# EAGLE board 04B-345-A1-01 (EAGLE 9.6.2)
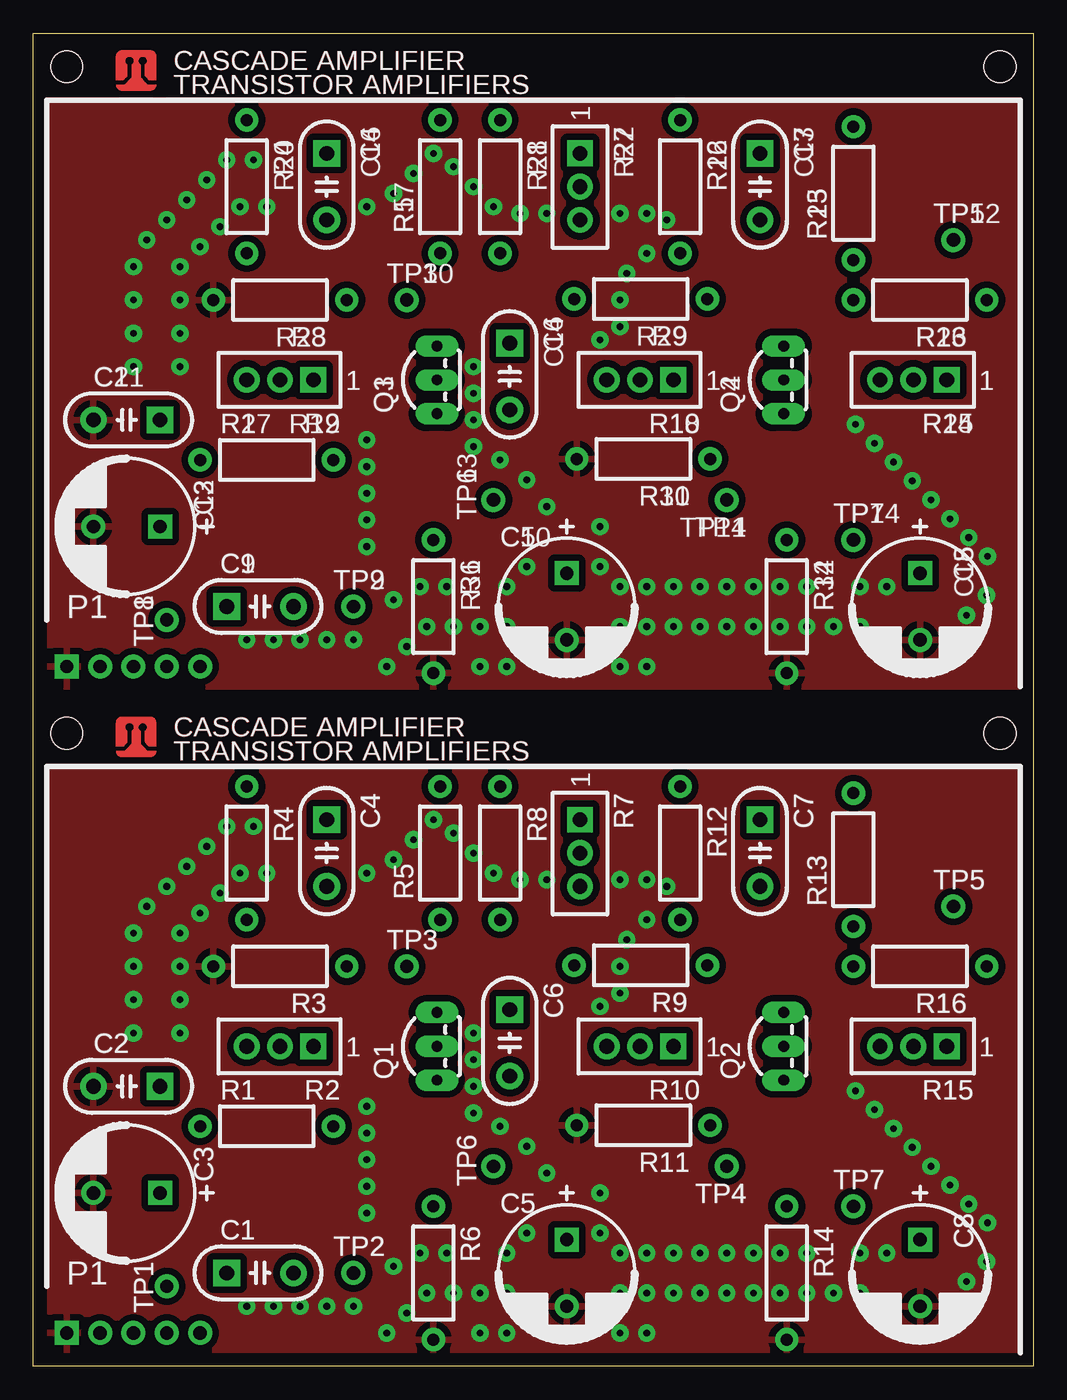
[diagram p0: board, top side]
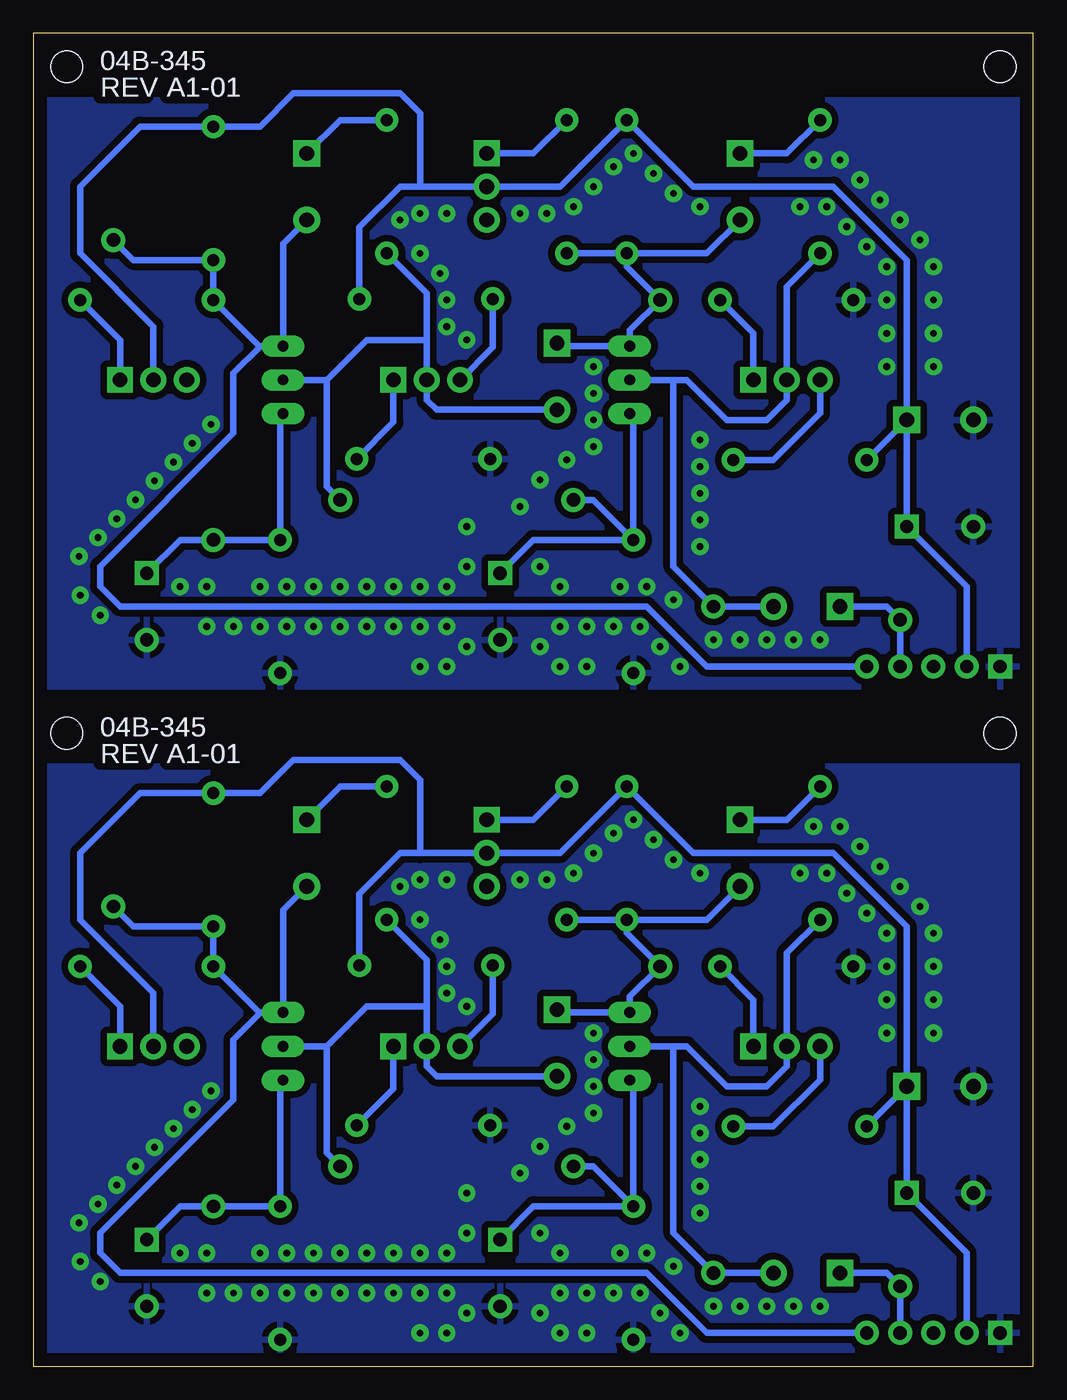
[diagram p1: board, bottom side, seen from below]

Size 75 x 100 mm. Coordinates in mm from the lower left corner, seen from the top.
Outline: 0,0 0,100 75,100 75,0 0,0
Copper layers (1*16): Top 0.035mm / dielectric 1.5mm / Bottom 0.035mm
Design rules "minipcb-THD": minimum track width 0.5mm, minimum drill 0.5mm, track to track 0.5mm, track to pad 0.5mm, pad to pad 0.5mm, via to via 0.5mm, smd to smd 0mil, copper to edge 1mm, drill to drill 1mm, minimum pad ring 0.4mm, minimum via ring 0.4mm, stop-mask expansion 0.1mm, vias tented up to drill 0.6mm, thermal gap 0.5mm

## Footprints (pad centres in the part's own frame; a part is rotated, then mirrored left to right if it is on the bottom)
C050-024X044 = drill 1.1 pad 2 square: 1 -2.5,0 | drill 1.1 pad 2: 2 2.5,0
C5MM = drill 1 square: + -2.5,0 | drill 1: - 2.5,0
PINS_1X5 = drill 1 square: 1 0,0 | drill 1: 2 2.5,0; 3 5,0; 4 7.5,0; 5 10,0
MINIPCB_0P_50X75 = hole 2.4: 72.5,47.5; 2.5,47.5
TO92-EBC-OVAL = drill 0.813 long: B 0,-1.27; C 2.54,-1.27; E -2.54,-1.27
0204/10 = drill 0.9 pad 1.75: 1 -5,0; 2 5,0
TRIM_0100 = drill 1.1 pad 1.93 square: 1 0,0 | drill 1.1 pad 1.93: 2 2.5,0; 3 5,0
PINS_1_TESTPOINT_KE5000_NOTEXT = drill 1: 1 0,0

## Placement (x,y rotation side)
C1  [C050-024X044]  17,7 0 top
C2  [C050-024X044]  7,21 180 top
C3  [C5MM]  7,13 180 top
C4  [C050-024X044]  22,38.5 270 top
C5  [C5MM]  40,7 270 top
C6  [C050-024X044]  35.73,24.26 270 top
C7  [C050-024X044]  54.5,38.5 270 top
C8  [C5MM]  66.5,7 270 top
C9  [C050-024X044]  17,57 0 top
C10  [C5MM]  40,57 270 top
C11  [C050-024X044]  7,71 180 top
C12  [C5MM]  7,63 180 top
C13  [C050-024X044]  54.5,88.5 270 top
C14  [C050-024X044]  35.73,74.26 270 top
C15  [C5MM]  66.5,57 270 top
C16  [C050-024X044]  22,88.5 270 top
P1  [PINS_1X5]  2.5,2.5 0 top
P2  [PINS_1X5]  2.5,52.5 0 top
PCB1  [MINIPCB_0P_50X75]  0,0 0 top
PCB2  [MINIPCB_0P_50X75]  0,50 0 top
Q1  [TO92-EBC-OVAL]  29,24 90 top
Q2  [TO92-EBC-OVAL]  55,24 90 top
Q3  [TO92-EBC-OVAL]  29,74 90 top
Q4  [TO92-EBC-OVAL]  55,74 90 top
R1  [0204/10]  17.5,18 0 top
R2  [TRIM_0100]  21,24 180 top
R3  [0204/10]  18.5,30 180 top
R4  [0204/10]  16,38.5 270 top
R5  [0204/10]  30.5,38.5 90 top
R6  [0204/10]  30,7 270 top
R7  [TRIM_0100]  41,41 270 top
R8  [0204/10]  35,38.5 270 top
R9  [0204/10]  45.55,30.07 180 top
R10  [TRIM_0100]  48,24 180 top
R11  [0204/10]  45.75,18.07 180 top
R12  [0204/10]  48.5,38.5 270 top
R13  [0204/10]  61.5,38 90 top
R14  [0204/10]  56.5,7 270 top
R15  [TRIM_0100]  68.5,24 180 top
R16  [0204/10]  66.5,30 180 top
R17  [0204/10]  30.5,88.5 90 top
R18  [TRIM_0100]  48,74 180 top
R19  [TRIM_0100]  21,74 180 top
R20  [0204/10]  16,88.5 270 top
R21  [0204/10]  35,88.5 270 top
R22  [TRIM_0100]  41,91 270 top
R23  [0204/10]  66.5,80 180 top
R24  [TRIM_0100]  68.5,74 180 top
R25  [0204/10]  61.5,88 90 top
R26  [0204/10]  48.5,88.5 270 top
R27  [0204/10]  17.5,68 0 top
R28  [0204/10]  18.5,80 180 top
R29  [0204/10]  45.55,80.07 180 top
R30  [0204/10]  45.75,68.07 180 top
R31  [0204/10]  30,57 270 top
R32  [0204/10]  56.5,57 270 top
TP1  [PINS_1_TESTPOINT_KE5000_NOTEXT]  10,6 90 top
TP2  [PINS_1_TESTPOINT_KE5000_NOTEXT]  24,7 0 top
TP3  [PINS_1_TESTPOINT_KE5000_NOTEXT]  28,30 0 top
TP4  [PINS_1_TESTPOINT_KE5000_NOTEXT]  52,15 180 top
TP5  [PINS_1_TESTPOINT_KE5000_NOTEXT]  69,34.5 0 top
TP6  [PINS_1_TESTPOINT_KE5000_NOTEXT]  34.5,15 90 top
TP7  [PINS_1_TESTPOINT_KE5000_NOTEXT]  61.5,12 0 top
TP8  [PINS_1_TESTPOINT_KE5000_NOTEXT]  10,56 90 top
TP9  [PINS_1_TESTPOINT_KE5000_NOTEXT]  24,57 0 top
TP10  [PINS_1_TESTPOINT_KE5000_NOTEXT]  28,80 0 top
TP11  [PINS_1_TESTPOINT_KE5000_NOTEXT]  52,65 180 top
TP12  [PINS_1_TESTPOINT_KE5000_NOTEXT]  69,84.5 0 top
TP13  [PINS_1_TESTPOINT_KE5000_NOTEXT]  34.5,65 90 top
TP14  [PINS_1_TESTPOINT_KE5000_NOTEXT]  61.5,62 0 top

## Library data of the parts
C1-C16 P1 P2 Q1-Q4 R1-R32 TP1-TP14 = minipcb
PCB1 PCB2 = minipcb; CIRCUIT_CATEGORY: TRANSISTOR AMPLIFIERS; PART_NUMBER: 04B-345; REVISION: A1-01; TITLE: CASCADE AMPLIFIER

## Nets
GND: C2.2 C3.- C5.- C8.- P1.1 R3.2 R6.2 R11.2 R14.2
GND1: C10.- C11.2 C12.- C15.- P2.1 R28.2 R30.2 R31.2 R32.2
N$1: C4.2 C6.1 Q1.C R5.1 R8.2 TP3.1
N$2: C5.+ Q1.E R6.1 TP6.1
N$3: C7.2 P1.5 Q2.C R13.1 R16.2 TP5.1
N$4: C8.+ Q2.E R14.1 TP7.1
N$5: C7.1 R12.1
N$6: C6.2 Q2.B R10.2 R12.2 TP4.1
N$7: R1.2 R2.3
N$8: R2.1 R3.1
N$9: C1.2 Q1.B R2.2 R4.2 TP2.1
N$10: C4.1 R4.1
N$11: R9.2 R10.3
N$12: R10.1 R11.1
N$13: C1.1 P1.4 TP1.1
N$14: R7.1 R8.1
N$15: R15.1 R16.1
N$16: C14.1 C16.2 Q3.C R17.1 R21.2 TP10.1
N$17: C10.+ Q3.E R31.1 TP13.1
N$18: C13.2 P2.5 Q4.C R23.2 R25.1 TP12.1
N$19: C15.+ Q4.E R32.1 TP14.1
N$20: C13.1 R26.1
N$21: C14.2 Q4.B R18.2 R26.2 TP11.1
N$22: R19.3 R27.2
N$23: R19.1 R28.1
N$24: C9.2 Q3.B R19.2 R20.2 TP9.1
N$25: R18.3 R29.2
N$26: R18.1 R30.1
N$27: C9.1 P2.4 TP8.1
N$28: C16.1 R20.1
N$29: R21.1 R22.1
N$30: R23.1 R24.1
V+: C2.1 C3.+ P1.2 R1.1 R5.2 R7.2 R9.1 R13.2 R15.2
V+1: C11.1 C12.+ P2.2 R17.2 R22.2 R24.2 R25.2 R27.1 R29.1

## Tracks (layer width: path | path; a pad name or v marks a point on that pad's centre or on a via)
GND  (via drill 0.5)
  other vias: 11.5,37.5 13,39 14.5,40.5 10,36 8.5,34.5 7.5,32.5 7.5,30 7.5,27.5 7.5,25 11,25 11,27.5 11,30 11,32.5 12.5,34 14,35.5 15.5,37 17.5,37 16.5,40.5 25,37 27,38 28.5,39.5 30,41 31.5,40 33,38.5 34.5,37 36.5,36.5 38.5,36.5 44,36.5 46,36.5 47.5,36 46,33.5 44.5,32 44,30 44,28 42.5,27 46,8.5 48,8.5 50,8.5 52,8.5 54,8.5 46,5.5 48,5.5 50,5.5 52,5.5 54,5.5 56,5.5 58,5.5 56,8.5 58,8.5 62,8.5 64,8.5 60,5.5 62,5.5 71.49,7.84 71.57,10.76 70.16,12.17 68.74,13.59 67.33,15 65.91,16.41 64.5,17.83 63.09,19.24 61.67,20.66 69.99,6.34 44,8.5 42.5,10 44,5.5 42.5,4 37,4 35.5,5.5 37,10 35.5,8.5 33.5,5.5 31,8.5 31.5,5.5 29.5,5.5 29,8.5 27,7.5 28,4 26.5,2.5 24,4.5 22,4.5 20,4.5 18,4.5 16,4.5 33.5,2.5 35.5,2.5 44,2.5 46,2.5 25,19.5 25,17.5 25,15.5 25,13.5 25,11.5 33,25 33,23 33,21 33,19 35,18 37,16.5 38.5,14.5 42.5,13
  pour Top: 1,1 74,1 74,45 1,45
  pour Bottom: 1,1 74,1 74,45 1,45
GND1  (via drill 0.5)
  other vias: 11.5,87.5 13,89 14.5,90.5 10,86 8.5,84.5 7.5,82.5 7.5,80 7.5,77.5 7.5,75 11,75 11,77.5 11,80 11,82.5 12.5,84 14,85.5 15.5,87 17.5,87 16.5,90.5 25,87 27,88 28.5,89.5 30,91 31.5,90 33,88.5 34.5,87 36.5,86.5 38.5,86.5 44,86.5 46,86.5 47.5,86 46,83.5 44.5,82 44,80 44,78 42.5,77 46,58.5 48,58.5 50,58.5 52,58.5 54,58.5 46,55.5 48,55.5 50,55.5 52,55.5 54,55.5 56,55.5 58,55.5 56,58.5 58,58.5 62,58.5 64,58.5 60,55.5 62,55.5 71.49,57.84 71.57,60.76 70.16,62.17 68.74,63.59 67.33,65 65.91,66.41 64.5,67.83 63.09,69.24 61.67,70.66 69.99,56.34 44,58.5 42.5,60 44,55.5 42.5,54 37,54 35.5,55.5 37,60 35.5,58.5 33.5,55.5 31,58.5 31.5,55.5 29.5,55.5 29,58.5 27,57.5 28,54 26.5,52.5 24,54.5 22,54.5 20,54.5 18,54.5 16,54.5 33.5,52.5 35.5,52.5 44,52.5 46,52.5 25,69.5 25,67.5 25,65.5 25,63.5 25,61.5 33,75 33,73 33,71 33,69 35,68 37,66.5 38.5,64.5 42.5,63
  pour Top: 1,51 74,51 74,95 1,95
  pour Bottom: 1,51 74,51 74,95 1,95
N$1
  Bottom 0.5: C4.2 24.5,33.5 R5.1 | R8.2 R5.1 | R5.1 30.5,32.5 TP3.1 30.27,27.73 Q1.C 35.51,26.54 C6.1
N$2
  Bottom 0.5: R6.1 30,21.19 Q1.E | C5.+ 37.5,12 R6.1 | R6.1 33,15 TP6.1
N$3
  Bottom 0.5: C7.2 56.27,34.23 Q2.C | TP5.1 67.5,33 R13.1 R16.2 58.04,26.54 Q2.C | Q2.C 57.96,26.54 60,24.5 60,20 70,10 70,8.5 68.5,7 29,7 24.5,2.5 P1.5
N$4
  Bottom 0.5: Q2.E 56.5,21.23 R14.1 TP7.1 64,12 C8.+
N$5
  Bottom 0.5: R12.1 52,43.5 C7.1
N$6
  Bottom 0.5: C6.2 44.76,21.76 45.5,22.5 R10.2 45.5,27 | 45.5,27 45.5,30.5 R12.2 | Q2.B 53,24 | 45.5,27 50,27 53,24 | TP4.1 53,16 53,24
N$7
  Bottom 0.5: R1.2 19.5,18 16,21.5 R2.3
N$8
  Bottom 0.5: R2.1 21,27.5 R3.1
N$9
  Bottom 0.5: R4.2 18.5,31 R2.2 18.5,22.5 20,21 23,21 26,24 27,24 | 27,24 Q1.B | C1.2 TP2.1 27,10 27,24
N$10
  Bottom 0.5: R4.1 18.5,41 C4.1
N$11
  Bottom 0.5: R10.3 40.55,26.45 R9.2
N$12
  Bottom 0.5: R11.1 48,20.82 R10.1
N$13
  Bottom 0.5: P1.4 TP1.1 11,7 C1.1
N$14
  Bottom 0.5: R7.1 37.5,41 R8.1
N$15
  Bottom 0.5: R15.1 68.5,27 R16.1
N$16
  Bottom 0.5: C16.2 24.5,83.5 R17.1 | R21.2 R17.1 | R17.1 30.5,82.5 TP10.1 30.27,77.73 Q3.C 35.51,76.54 C14.1
N$17
  Bottom 0.5: R31.1 30,71.19 Q3.E | C10.+ 37.5,62 R31.1 | R31.1 33,65 TP13.1
N$18
  Bottom 0.5: C13.2 56.27,84.23 Q4.C | TP12.1 67.5,83 R25.1 R23.2 58.04,76.54 Q4.C | Q4.C 57.96,76.54 60,74.5 60,70 70,60 70,58.5 68.5,57 29,57 24.5,52.5 P2.5
N$19
  Bottom 0.5: Q4.E 56.5,71.23 R32.1 TP14.1 64,62 C15.+
N$20
  Bottom 0.5: R26.1 52,93.5 C13.1
N$21
  Bottom 0.5: C14.2 44.76,71.76 45.5,72.5 R18.2 45.5,77 | 45.5,77 45.5,80.5 R26.2 | Q4.B 53,74 | 45.5,77 50,77 53,74 | TP11.1 53,66 53,74
N$22
  Bottom 0.5: R27.2 19.5,68 16,71.5 R19.3
N$23
  Bottom 0.5: R19.1 21,77.5 R28.1
N$24
  Bottom 0.5: R20.2 18.5,81 R19.2 18.5,72.5 20,71 23,71 26,74 27,74 | 27,74 Q3.B | C9.2 TP9.1 27,60 27,74
N$25
  Bottom 0.5: R18.3 40.55,76.45 R29.2
N$26
  Bottom 0.5: R30.1 48,70.82 R18.1
N$27
  Bottom 0.5: P2.4 TP8.1 11,57 C9.1
N$28
  Bottom 0.5: R20.1 18.5,91 C16.1
N$29
  Bottom 0.5: R22.1 37.5,91 R21.1
N$30
  Bottom 0.5: R24.1 68.5,77 R23.1
V+
  Bottom 0.5: P1.2 5,8.5 C3.+ C2.1 | C2.1 9.5,33 15,38.5 25.5,38.5 R5.2 35.5,38.5 R7.2 46,38.5 | 46,38.5 47.5,38.5 50.55,35.45 R9.1 | 46,38.5 46,44 47.5,45.5 55.5,45.5 58,43 R13.2 67,43 71.5,38.5 71.5,33.5 66,28 R15.2 | C2.1 R1.1
V+1
  Bottom 0.5: P2.2 5,58.5 C12.+ C11.1 | C11.1 9.5,83 15,88.5 25.5,88.5 R17.2 35.5,88.5 R22.2 46,88.5 | 46,88.5 47.5,88.5 50.55,85.45 R29.1 | 46,88.5 46,94 47.5,95.5 55.5,95.5 58,93 R25.2 67,93 71.5,88.5 71.5,83.5 66,78 R24.2 | C11.1 R27.1

## Text on the board
_tNames: C4 | R7 | C7 | R4 | R8 | R12 | TP5 | R5 | R13 | TP3 | C6 | R3 | R9 | R16 | C2 | R2 | Q1 | R10 | Q2 | R15 | R1 | C3 | R11 | TP4 | TP6 | TP7 | C5 | C8 | R6 | R14 | C1 | TP2 | TP1 | C4 | R7 | C7 | R4 | R8 | R12 | TP5 | R5 | R13 | TP3 | C6 | R3 | R9 | R16 | C2 | R2 | Q1 | R10 | Q2 | R15 | R1 | C3 | R11 | TP4 | TP6 | TP7 | C5 | C8 | R6 | R14 | C1 | TP2 | TP1